# EAGLE board PCB ERC - Coil DC to AC v0 (EAGLE 9.7.0)
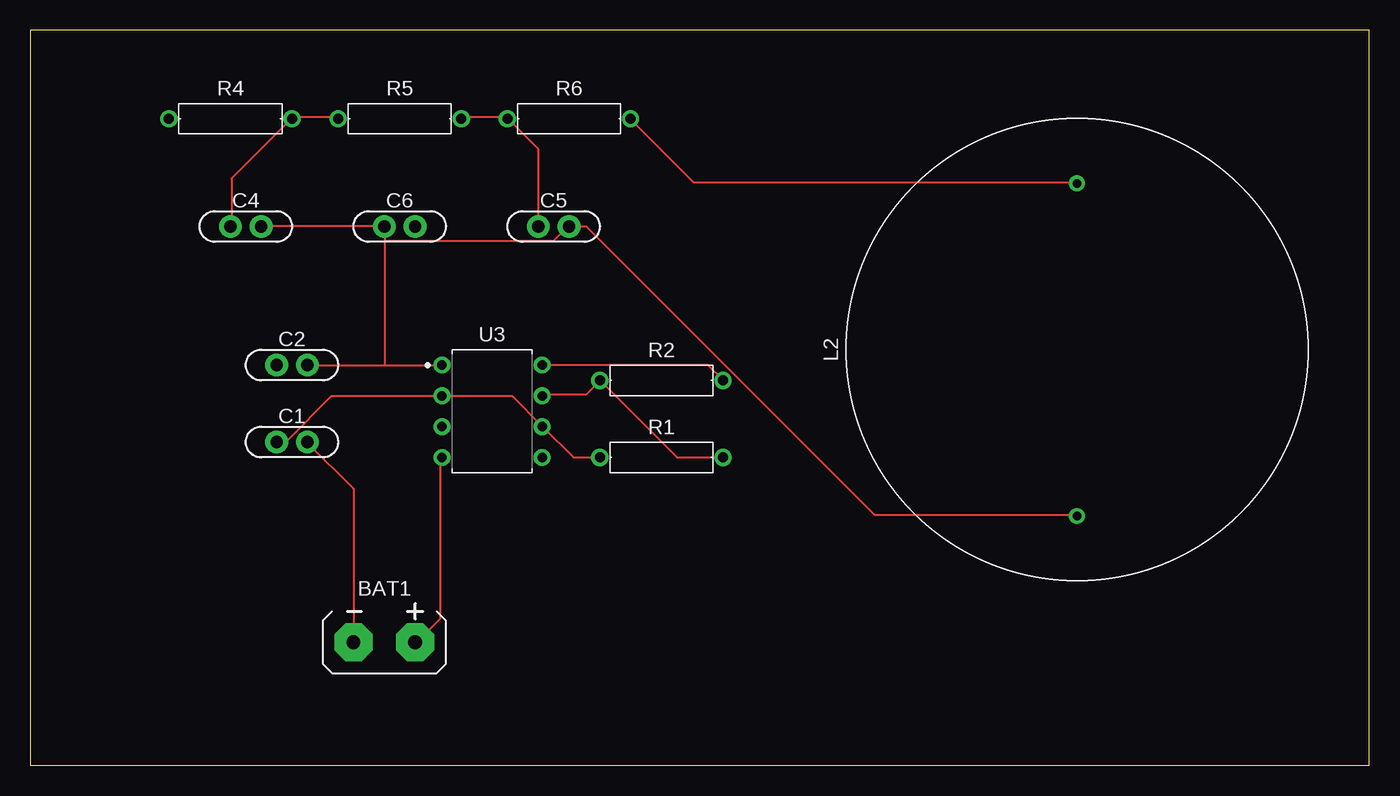
[diagram p0: board, top side]
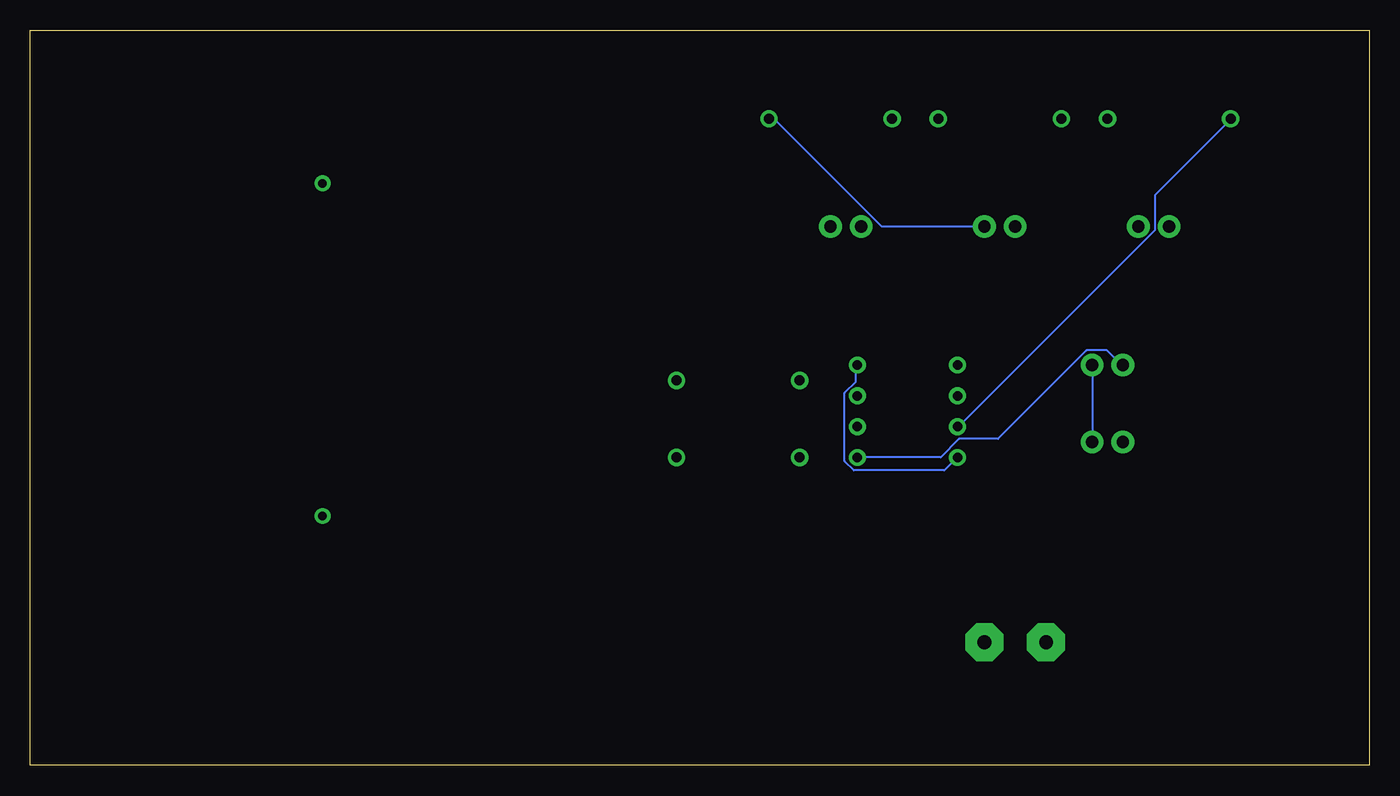
[diagram p1: board, bottom side, seen from below]

Size 110.47 x 60.63 mm. Coordinates in mm from the lower left corner, seen from the top.
Outline: 0,0 110.47,0 110.47,60.63 0,60.63 0,0
Copper layers (1*16): Top / Bottom
Stack-up Default Layer Stack: Top User Defined 0.035mm / Dielectric-1 User Defined 1.5mm / Bottom User Defined 0.035mm
Design rules "default": minimum track width 6mil, minimum drill 0.35mm, track to track 6mil, track to pad 6mil, pad to pad 6mil, via to via 6mil, smd to smd 6mil, copper to edge 40mil, drill to drill 6mil, minimum pad ring 10mil, minimum via ring 8mil, stop-mask expansion 4mil, vias tented up to drill 0mil, thermal gap 10mil

## Footprints (pad centres in the part's own frame; a part is rotated, then mirrored left to right if it is on the bottom)
BATTERY-GENERIC = drill 1.118 pad 3.15 octagon: + 2.54,0; - -2.54,0
CAP-THRU-2.54MM = drill 1.016 pad 1.88: 1 -1.27,0; 2 1.27,0
INDRD2743W50D3810H2616B = drill 0.708 pad 1.308: 1 -13.716,0; 2 13.716,0
RESAD1016W63L850D250B = drill 0.83 pad 1.43: 1 -5.08,0; 2 5.08,0
DIP826W53P254L959H508Q8B = drill 0.786 pad 1.386: 1 -4.13,3.81; 2 -4.13,1.27; 3 -4.13,-1.27; 4 -4.13,-3.81; 5 4.13,-3.81; 6 4.13,-1.27; 7 4.13,1.27; 8 4.13,3.81

## Placement (x,y rotation side)
BAT1  9V  [BATTERY-GENERIC]  29.21,10.16 0 top
C1  90n  [CAP-THRU-2.54MM]  21.59,26.67 0 top
C2  105n  [CAP-THRU-2.54MM]  21.59,33.02 0 top
C4  47n  [CAP-THRU-2.54MM]  17.78,44.45 0 top
C5  47n  [CAP-THRU-2.54MM]  43.18,44.45 0 top
C6  47n  [CAP-THRU-2.54MM]  30.48,44.45 0 top
L2  20m  [INDRD2743W50D3810H2616B]  86.36,34.29 90 top
R1  1k  [RESAD1016W63L850D250B]  52.07,25.4 0 top
R2  1k  [RESAD1016W63L850D250B]  52.07,31.75 0 top
R4  100  [RESAD1016W63L850D250B]  16.51,53.34 0 top
R5  100  [RESAD1016W63L850D250B]  30.48,53.34 0 top
R6  100  [RESAD1016W63L850D250B]  44.45,53.34 0 top
U3  LM555_DIP  [DIP826W53P254L959H508Q8B]  38.1,29.21 0 top

## Library data of the parts
BAT1 C1 C2 C4-C6 R1 R2 R4-R6 = Tinkercad
L2 = Tinkercad; CATEGORY: Inductor; SUB-CATEGORY: Fixed
U3 = Tinkercad; CATEGORY: IC_Clock-Timing; CURRENT-SUPPLY: 10mA; DESCRIPTION: IC OSC SINGLE TIMER 100KHZ 8-DIP; FREQUENCY: 100kHz; MANUFACTURER: Texas Instruments; MPN: LM555CN/NOPB; OPERATING_TEMP: 0°C to 70°C; PART_STATUS: Active; ROHS_COMPLIANT: ROHS3 Compliant; SUB-CATEGORY: Timer

## Nets
BAT1+: BAT1.+ R2.2 U3.4 U3.8
BAT1-: BAT1.- C1.2 C2.2 C4.2 C5.2 C6.1 L2.1 U3.1
R4_2: C4.1 R4.2 R5.1
R5_2: C5.1 R5.2 R6.1
R6_2: C6.2 L2.2 R6.2
U3_CV: C2.1 U3.5
U3_DIS: R1.2 R2.1 U3.7
U3_OUT: R4.1 U3.3
U3_THR: C1.1 R1.1 U3.2 U3.6

## Tracks (layer width: path | path; a pad name or v marks a point on that pad's centre or on a via)
BAT1+
  Top 0.152: U3.8 55.93,33.02 57.15,31.8 R2.2 | U3.4 33.83,25.4 33.83,12.14 31.85,10.16 BAT1.+
  Bottom 0.152: U3.8 42.37,33.02 42.37,31.65 43.28,30.73 43.28,25.09 42.52,24.33 35.05,24.33 33.99,25.4 U3.4
BAT1-
  Top 0.152: C4.2 C6.1 29.26,44.45 29.26,43.23 | C2.2 29.26,33.02 | 29.26,33.02 U3.1 | BAT1.- 26.67,22.81 22.86,26.62 C1.2 | 29.26,33.02 29.26,43.23 | L2.1 86.26,20.68 69.65,20.68 45.87,44.45 C5.2 44.35,44.45 43.13,43.23 29.26,43.23
  Bottom 0.152: C2.2 C1.2
R4_2
  Top 0.152: R5.1 25.3,53.44 21.64,53.44 R4.2 21.49,53.29 16.61,48.41 16.61,44.45 C4.1
R5_2
  Top 0.152: R5.2 35.66,53.44 39.32,53.44 R6.1 39.47,53.29 41.91,50.85 C5.1
R6_2
  Top 0.152: L2.2 86.26,48.11 54.71,48.11 49.53,53.29 R6.2
  Bottom 0.152: C6.2 40.23,44.45 49.07,53.29 49.53,53.29 R6.2
U3_CV
  Bottom 0.152: U3.5 35.36,25.4 33.83,26.92 30.63,26.92 23.32,34.24 21.64,34.24 20.42,33.02 C2.1
U3_DIS
  Top 0.152: U3.7 42.37,30.58 45.87,30.58 46.94,31.65 R2.1 53.34,25.4 R1.2
U3_OUT
  Bottom 0.152: U3.3 33.83,27.99 17.68,44.14 17.68,47.04 11.43,53.29 R4.1
U3_THR
  Top 0.152: R1.1 44.81,25.4 42.37,27.84 U3.6 42.21,27.99 39.78,30.43 33.99,30.43 U3.2 33.83,30.43 24.84,30.43 21.18,26.77 20.42,26.77 C1.1